# Altium PCB Channel Fix (OPEN COLLECTOR).PcbDoc
Units mil, origin at the board's own origin, x right, y up, seen from the top; angles counter-clockwise.
Board outline 6000 x 4000 mil, 2 copper layers (Top Layer, Bottom Layer); 19 components, 13 nets, 39 pads, 0 vias.
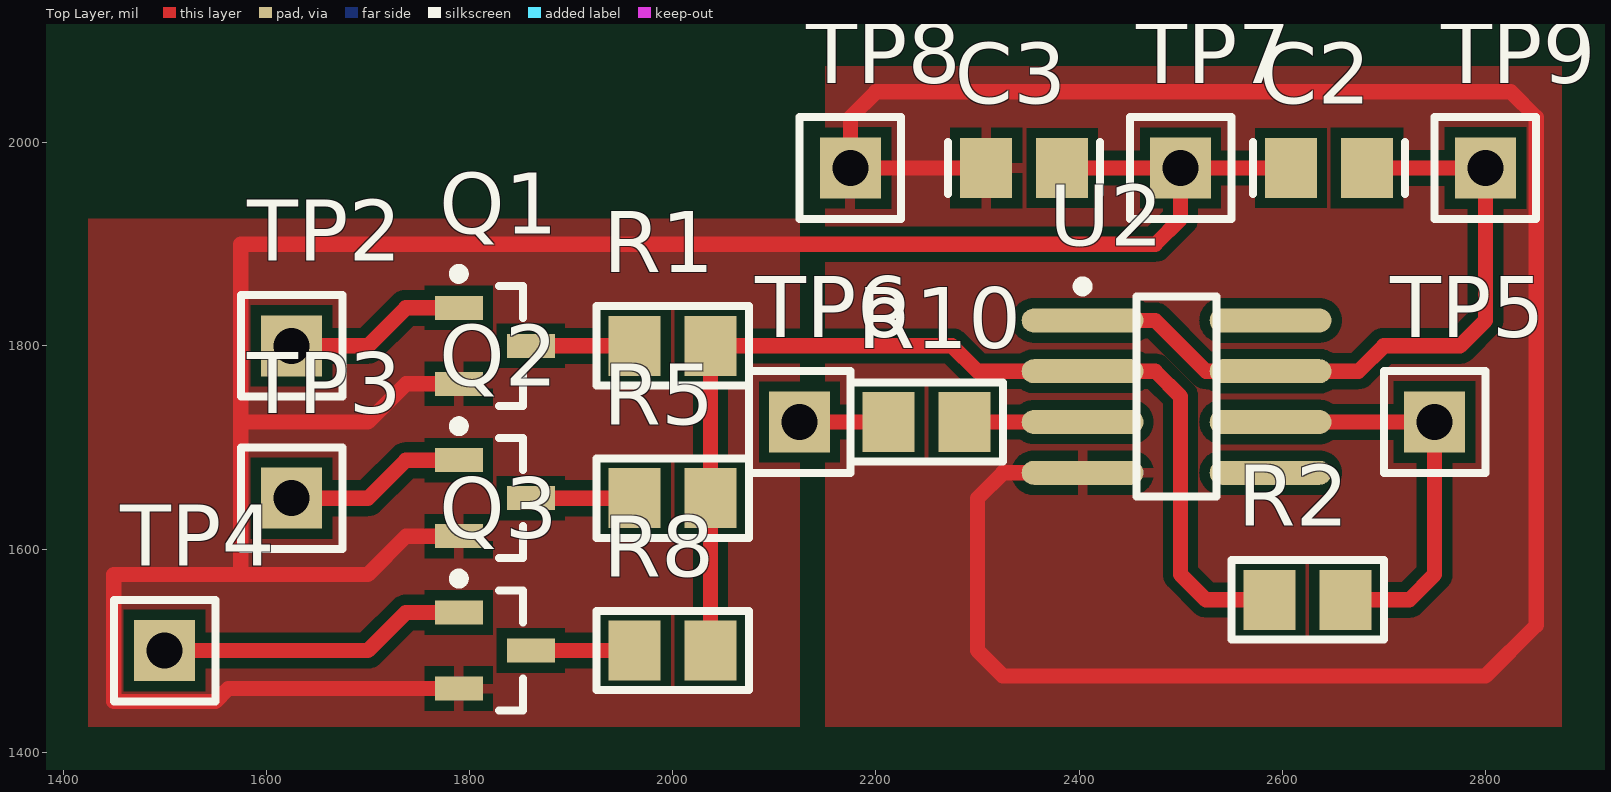
[diagram p0: Top Layer view]
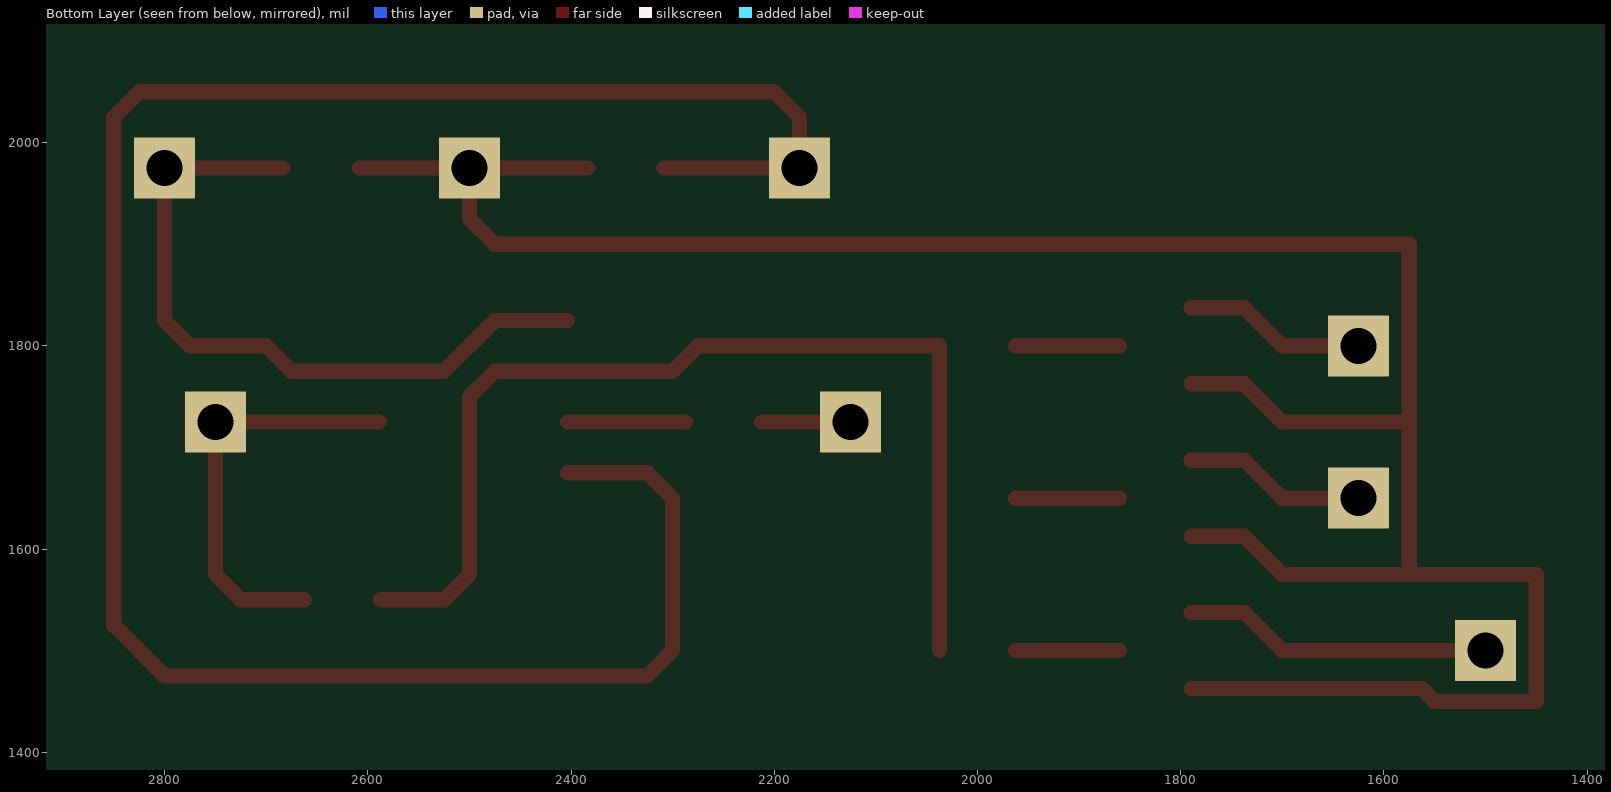
[diagram p1: Bottom Layer view, seen from below]

## Layer stack, top to bottom
Top Layer: signal copper 1.4
Dielectric: dielectric 12.6, FR-4, Dk 4.8
Bottom Layer: signal copper 1.4

## Board outline
1000,1000 7000,1000 7000,5000 1000,5000

## Design rules (kind name [scope] priority, off if disabled: settings)
Clearance [All] p1: gap=10
PolygonConnect [All] p1: connectstyle=Relief reliefconductorwidth=10 reliefentries=4 polygonreliefangle="90 Angle" airgapwidth=10
RoutingVias [All] p1: holewidth=28 width=50 viastyle="Through Hole" minholewidth=28 minwidth=50 maxholewidth=28 maxwidth=50
SolderMaskExpansion [All] p1: expansion=4
Width [All] p1: maxlimit=100 minlimit=10 preferedwidth=10
28 further rules are at their usual default settings.

## Components (designator, comment, footprint, x,y, rotation, side; value= is the part's Value field where it differs from the comment)
C2 "100nF" "CAP (3D) - 0805" 2646.06,1975 r0 top
C3 "100nF" "CAP (3D) - 0805" 2346.06,1975 r0 top
Q1 "MMUN2211LT1" SOT23-3L 1825,1800 r0 top
Q2 "MMUN2211LT1" SOT23-3L 1825,1650 r0 top
Q3 "MMUN2211LT1" SOT23-3L 1825,1500 r0 top
R1 "1k" "RES (3D) - 0805" 2000,1800 r0 top
R2 "100k" "RES (3D) - 0805" 2625,1550 r0 top
R5 "11k" "RES (3D) - 0805" 2000,1650 r0 top
R8 "100k" "RES (3D) - 0805" 2000,1500 r0 top
R10 "100R" "RES (3D) - 0805" 2250,1725 r0 top
TP2 "TestPoint" TP 1625,1800 r0 top
TP3 "TestPoint" TP 1625,1650 r0 top
TP4 "TestPoint" TP 1500,1500 r0 top
TP5 "TestPoint" TP 2750,1725 r0 top
TP6 "TestPoint" TP 2125,1725 r0 top
TP7 "TestPoint" TP 2500,1975 r0 top
TP8 "TestPoint" TP 2175,1975 r0 top
TP9 "TestPoint" TP 2800,1975 r0 top
U2 "MAX4238ASA+" SO-8 2496.06,1750 r0 top

## Footprints (in the part's own frame and the unit in brackets; to place one, negate y for a bottom-side part, rotate by r counter-clockwise, add the part's x,y. Pads: shape width x height; smd on the part's side, far side on the other; paste and mask are expansions set on the pad)
"CAP (3D) - 0805" [mm]
  rect 1.3x1.5 smd: 1(-0.95,0) 2(0.95,0)
  silkscreen extent -1.9,-0.65 1.9,0.65, body extent -1,-0.63 1,0.63, height 1
"RES (3D) - 0805" [mm]
  rect 1.3x1.5 smd: 1(-0.95,0) 2(0.95,0)
  silkscreen extent -1.91,-0.99 1.91,0.99, body extent -1,-0.63 1,0.63, height 1
SO-8 [mm] "SOIC, 8-Leads, Body 4.9x3.9mm, Pitch 1.27mm, IPC High Density"
  oval 3.048x0.6 smd: 1(-2.35,1.905) 2(-2.35,0.635) 3(-2.35,-0.635) 4(-2.35,-1.905) 5(2.35,-1.905) 6(2.35,-0.635) 7(2.35,0.635) 8(2.35,1.905)
  silkscreen extent -2.47,-2.5 1,2.88, body extent -2.9,-2.45 3.1,2.45, height 1.75
SOT23-3L [mm] "SOT23, 3-Leads, Body 2.9x1.3mm, Pitch 0.95mm, Lead Span 2.5mm, IPC High Density"
  rect 1.2x0.6 smd: 1(-0.9,0.95) 2(-0.9,-0.95) 3(0.9,0)
  silkscreen extent -1.02,-1.5 0.7,1.92, body extent -1.25,-1.5 1.25,1.5, height 1.12
TP [mil] "Connector; Header; 2 Position"
  rect 60x60 hole 35.43: 1(0,0)
  silkscreen extent -50,-50 50,50

## Part data
C2 C3: library part Cap, "Capacitor"
Q1 Q2 Q3: library part "MMUN221LT1 NPN DIGITAL TRANSISTOR"
R1 R2 R5 R8 R10: library part "RES SMD 0603", "RESISTOR SMD 0603"
U2: library part MAX495CSA, "Single Voltage-Feedback Operational Amplifier"

## Nets (pads, with @x,y where several pads share a name; then routed paths per layer and width w, separated by ;. In a path a pad name is that pad's centre, name@x,y a point inside that pad or via, vN(x,y) a via of type N, cw(c..) or ccw(c..) an arc to the next point about the centre after c; other vN are vias at no path point)
CHANNEL_SAMPLE: R2.2 TP5.1 U2.6 | length 409.4
  Top Layer w15: U2.6 TP5.1 2750,1575 2725,1550 R2.2
GND: C3.1 TP8.1 U2.4 | length 2224.3
  Top Layer w15: C3.1 TP8.1 2175,2025 2200,2050 2825,2050 2850,2025 2850,1525 2800,1475 2325,1475 2300,1500 2300,1650 2325,1675 U2.4
K004: Q3.1 TP4.1 | length 305.1
  Top Layer w15: TP4.1 1700,1500 1737.4,1537.4 Q3.1
K010: Q2.1 TP3.1 | length 180.1
  Top Layer w15: TP3.1 1700,1650 1737.4,1687.4 Q2.1
K100: Q1.1 TP2.1 | length 180.1
  Top Layer w15: TP2.1 1700,1800 1737.4,1837.4 Q1.1
NetQ1_3: Q1.3 R1.1 | length 102.2
  Top Layer w15: Q1.3 R1.1
NetQ2_3: Q2.3 R5.1 | length 102.2
  Top Layer w15: Q2.3 R5.1
NetQ3_3: Q3.3 R8.1 | length 102.2
  Top Layer w15: Q3.3 R8.1
NetR1_2: R1.2 R2.1 R5.2 R8.2 U2.2 | length 1056.3
  Top Layer w15: R8.2 R5.2 R1.2 2275,1800 2300,1775 U2.2 2475,1775 2500,1750 2500,1575 2525,1550 R2.1
NetR10_2: R10.2 U2.3 | length 116.1
  Top Layer w15: R10.2 U2.3
SAMPLE: R10.1 TP6.1 | length 87.6
  Top Layer w15: TP6.1 R10.1
VCC: C2.2 TP9.1 U2.1 U2.7 | length 704.4
  Top Layer w15: U2.1 2475,1825 2525,1775 U2.7 2675,1775 2700,1800 2775,1800 2800,1825 TP9.1 C2.2
VGND: C2.1 C3.2 Q1.2 Q2.2 Q3.2 TP7.1 | length 2592.2
  Top Layer w15: Q3.2 1562.6,1462.6 1550,1450 1450,1450 1450,1575 1575,1575 ; Q2.2 1737.6,1612.6 1700,1575 1575,1575 ; Q1.2 1737.6,1762.6 1700,1725 1575,1725 ; C3.2 TP7.1@2496.06,1975 ; C2.1 TP7.1@2496.06,1975 ; 1575,1575 1575,1725 ; 1575,1725 1575,1900 2475,1900 2500,1925 2500,1971.06 TP7.1@2496.06,1975
pads on no net: U2.5 U2.8

## Polygon pours and split planes (outlines as drawn)
GND on Top Layer "Mechanical 3-No Net" (solid, pour order 4): 2150,2075 2150,1425 2875,1425 2875,2075 2150,2075
VGND on Top Layer "Mechanical 3-No Net" (solid, pour order 2): 1425,1925 2125,1925 2125,1425 1425,1425 1425,1925

## Silkscreen, mask and mechanical layers (free items; w line width, h text height)
Mechanical 1:
  lines w10: 1425,1425 2125,1425 2875,1425 2875,1450 2875,2075 2125,2075 2125,1925 1425,1925 1425,1425